# EAGLE board Tested USB TTL Dongle + Arduino2 (EAGLE 6.1)
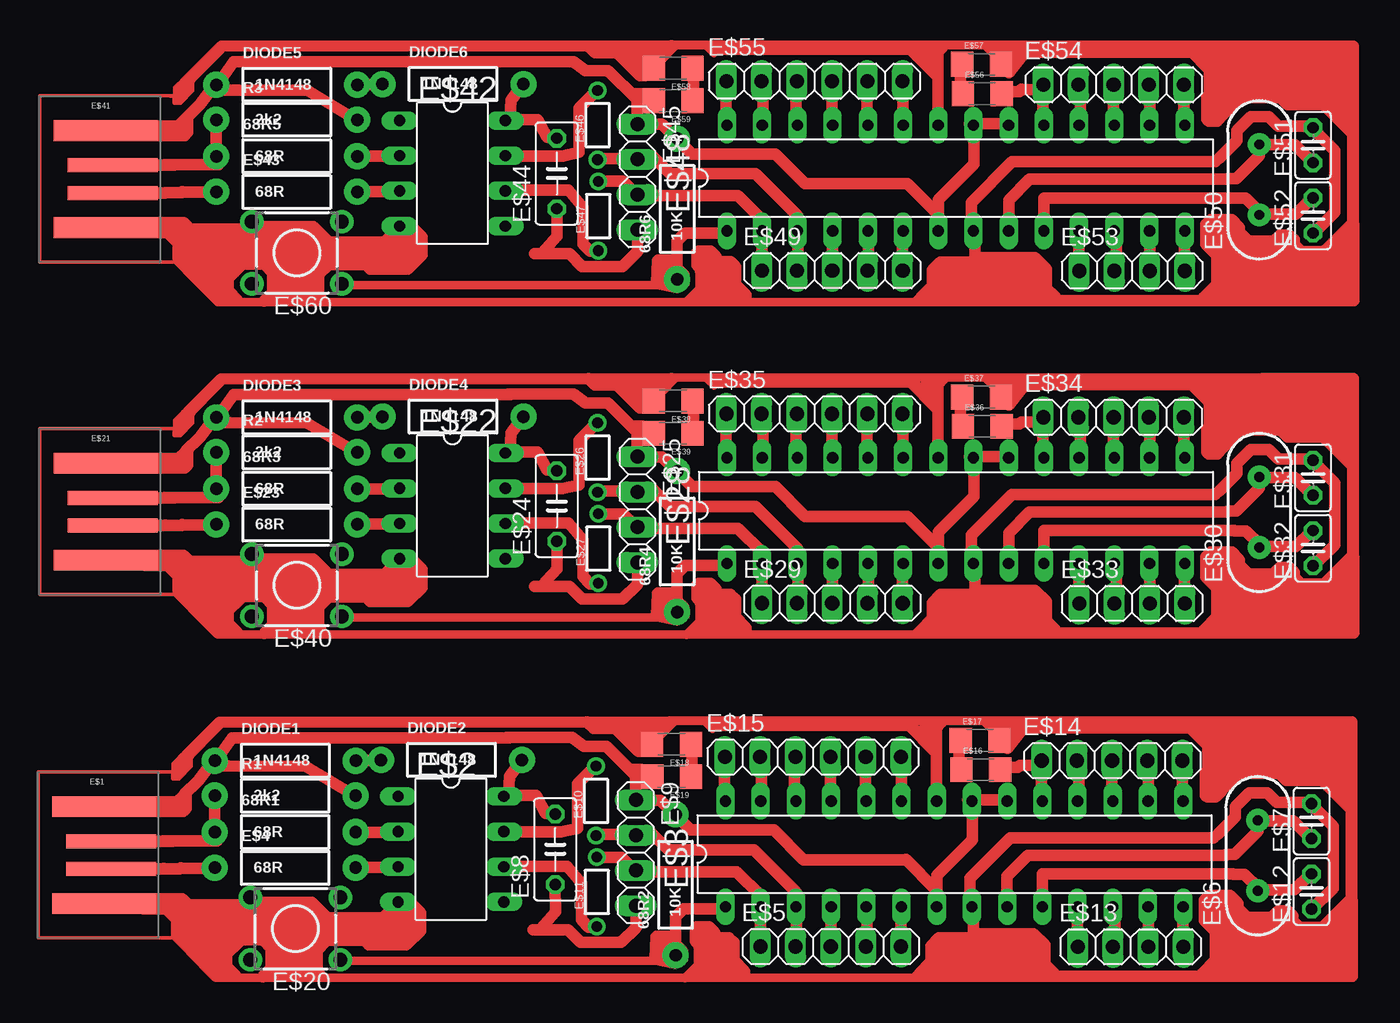
[diagram p0: board, top side]

No outline drawn. Coordinates in mm, seen from the top.
Copper layers (1*16): Top 0.035mm / dielectric 1.5mm / Bottom 0.035mm
Design rules: minimum track width 10mil, minimum drill 24mil, track to track 8mil, track to pad 8mil, pad to pad 8mil, via to via 8mil, smd to smd 8mil, copper to edge 40mil, drill to drill 8mil, minimum pad ring 10mil, minimum via ring 8mil, stop-mask expansion 4mil, vias tented up to drill 0mil, thermal gap 10mil

## Footprints (pad centres in the part's own frame; a part is rotated, then mirrored left to right if it is on the bottom)
AXIAL-0.4 = drill 0.9 pad 1.88: P$1 -5.08,0; P$2 5.08,0
USB-A-PCB = smd 7.5 x 1.5: 5V -0.2,-3.5; GND -0.2,3.5 | smd 6.5 x 1: USB_M 0.3,-1; USB_P 0.3,1
DIL8 = drill 0.813 long: 1 -3.81,-3.81; 2 -1.27,-3.81; 3 1.27,-3.81; 4 3.81,-3.81; 5 3.81,3.81; 6 1.27,3.81; 7 -1.27,3.81; 8 -3.81,3.81
DIL28-3 = drill 0.813 long: 1 -16.51,-3.81; 2 -13.97,-3.81; 3 -11.43,-3.81; 4 -8.89,-3.81; 5 -6.35,-3.81; 6 -3.81,-3.81; 7 -1.27,-3.81; 8 1.27,-3.81; 9 3.81,-3.81; 10 6.35,-3.81; 11 8.89,-3.81; 12 11.43,-3.81; 13 13.97,-3.81; 14 16.51,-3.81; 15 16.51,3.81; 16 13.97,3.81; 17 11.43,3.81; 18 8.89,3.81; 19 6.35,3.81; 20 3.81,3.81; 21 1.27,3.81; 22 -1.27,3.81; 23 -3.81,3.81; 24 -6.35,3.81; 25 -8.89,3.81; 26 -11.43,3.81; 27 -13.97,3.81; 28 -16.51,3.81
1X05 = drill 1.016 long: 1 -5.08,0; 2 -2.54,0; 3 0,0; 4 2.54,0; 5 5.08,0
HC49US = drill 0.7 pad 1.651: 1 -2.54,0; 2 2.54,0
C025-025X050 = drill 0.813 octagon: 1 -1.27,0; 2 1.27,0
C050-030X075 = drill 0.813 octagon: 1 -2.54,0; 2 2.54,0
1X04 = drill 1.016 long: 1 -3.81,0; 2 -1.27,0; 3 1.27,0; 4 3.81,0
1/6W-RES = drill 0.762: 1 -2.5,0; 2 2.5,0
1X06 = drill 1.016 long: 1 -6.35,0; 2 -3.81,0; 3 -1.27,0; 4 1.27,0; 5 3.81,0; 6 6.35,0
1206 = smd 1.6 x 1.8: 1 -1.4,0; 2 1.4,0
TL1105 = drill 1 pad 1.676: 1 -2.25,3.25; 2 2.25,3.25; 3 -2.25,-3.25; 4 2.25,-3.25

## Placement (x,y rotation side)
68R1  68R  [AXIAL-0.4]  13.06,10.56 0 top
68R2  10K  [AXIAL-0.4]  41.22,6.75 90 top
68R3  68R  [AXIAL-0.4]  13.17,35.33 0 top
68R4  10K  [AXIAL-0.4]  41.34,31.52 90 top
68R5  68R  [AXIAL-0.4]  13.17,59.33 0 top
68R6  10K  [AXIAL-0.4]  41.34,55.52 90 top
DIODE1  1N4148  [AXIAL-0.4]  13.06,15.71 0 top
DIODE2  1N4148  [AXIAL-0.4]  25.06,15.77 0 top
DIODE3  1N4148  [AXIAL-0.4]  13.17,40.48 0 top
DIODE4  1N4148  [AXIAL-0.4]  25.17,40.54 0 top
DIODE5  1N4148  [AXIAL-0.4]  13.17,64.48 0 top
DIODE6  1N4148  [AXIAL-0.4]  25.17,64.54 0 top
E$1  [USB-A-PCB]  0.22,8.9 0 top
E$2  [DIL8]  25.02,9.33 270 top
E$3  [DIL28-3]  61.33,8.98 0 top
E$4  68R  [AXIAL-0.4]  13.06,7.99 0 top
E$5  [1X05]  52.42,2.3 0 top
E$6  [HC49US]  83.22,8.87 90 top
E$7  [C025-025X050]  87.1,11.36 90 top
E$8  [C050-030X075]  32.55,9.31 90 top
E$9  [1X04]  38.36,9.06 270 top
E$10  [1/6W-RES]  35.49,12.81 90 top
E$11  [1/6W-RES]  35.54,6.25 90 top
E$12  [C025-025X050]  87.1,6.27 90 top
E$13  [1X04]  74.05,2.29 0 top
E$14  [1X05]  72.71,15.72 0 top
E$15  [1X06]  51.13,15.97 0 top
E$16  [1206]  63.23,15.07 0 top
E$17  [1206]  63.19,17.18 0 top
E$18  [1206]  40.94,16.9 180 top
E$19  [1206]  40.94,14.56 180 top
E$20  [TL1105]  13.8,3.6 90 top
E$21  [USB-A-PCB]  0.33,33.67 0 top
E$22  [DIL8]  25.13,34.1 270 top
E$23  68R  [AXIAL-0.4]  13.17,32.76 0 top
E$24  [C050-030X075]  32.66,34.08 90 top
E$25  [1X04]  38.47,33.83 270 top
E$26  [1/6W-RES]  35.6,37.58 90 top
E$27  [1/6W-RES]  35.65,31.02 90 top
E$28  [DIL28-3]  61.44,33.75 0 top
E$29  [1X05]  52.53,27.07 0 top
E$30  [HC49US]  83.33,33.64 90 top
E$31  [C025-025X050]  87.21,36.13 90 top
E$32  [C025-025X050]  87.21,31.04 90 top
E$33  [1X04]  74.16,27.06 0 top
E$34  [1X05]  72.82,40.49 0 top
E$35  [1X06]  51.24,40.74 0 top
E$36  [1206]  63.34,39.84 0 top
E$37  [1206]  63.3,41.95 0 top
E$38  [1206]  41.05,41.67 180 top
E$39  [1206]  41.05,39.33 180 top
E$40  [TL1105]  13.91,28.37 90 top
E$41  [USB-A-PCB]  0.33,57.67 0 top
E$42  [DIL8]  25.13,58.09 270 top
E$43  68R  [AXIAL-0.4]  13.17,56.76 0 top
E$44  [C050-030X075]  32.66,58.08 90 top
E$45  [1X04]  38.47,57.83 270 top
E$46  [1/6W-RES]  35.6,61.57 90 top
E$47  [1/6W-RES]  35.65,55.01 90 top
E$48  [DIL28-3]  61.44,57.75 0 top
E$49  [1X05]  52.53,51.07 0 top
E$50  [HC49US]  83.33,57.63 90 top
E$51  [C025-025X050]  87.21,60.12 90 top
E$52  [C025-025X050]  87.21,55.04 90 top
E$53  [1X04]  74.16,51.05 0 top
E$54  [1X05]  72.82,64.49 0 top
E$55  [1X06]  51.24,64.74 0 top
E$56  [1206]  63.34,63.84 0 top
E$57  [1206]  63.3,65.95 0 top
E$58  [1206]  41.05,65.67 180 top
E$59  [1206]  41.05,63.33 180 top
E$60  [TL1105]  13.91,52.36 90 top
R1  2k2  [AXIAL-0.4]  13.06,13.19 0 top
R2  2k2  [AXIAL-0.4]  13.17,37.96 0 top
R3  2k2  [AXIAL-0.4]  13.17,61.96 0 top

## Library data of the parts
68R1-68R6 DIODE1-DIODE6 E$4 E$10 E$11 E$16-E$19 E$23 E$26 E$27 E$36-E$39 E$43 E$46 E$47 E$56-E$59 R1-R3 = SparkFun-Passives
E$1 E$21 E$41 = SparkFun-Connectors
E$2 E$22 E$42 = microchip
E$3 E$28 E$48 = atmel
E$5 E$9 E$13-E$15 E$25 E$29 E$33-E$35 E$45 E$49 E$53-E$55 = pinhead
E$6 E$30 E$50 = SparkFun-FreqCtrl
E$7 E$8 E$12 E$24 E$31 E$32 E$44 E$51 E$52 = rcl
E$20 E$40 E$60 = switch

## Tracks (layer width: path | path; a pad name or v marks a point on that pad's centre or on a via)
S$1
  Top 0.813: 5.53,9.93 8.15,9.93 7.91,10.29
S$2
  Top 0.813: 5.53,7.96 7.6,7.96 8.03,8.04
S$3
  Top 0.813: 7.7,12.77 7.97,13.2 7.97,10.44
S$4
  Top 0.813: 17.67,10.56 21.4,10.56 21.49,10.65
S$5
  Top 0.813: 17.77,8.01 21.56,8.01 21.74,8.16
S$6
  Top 0.254: 5.49,3.74 5.37,3.63 5.37,3.91 5.41,3.95
S$7
  Top 0.813: 4.42,12.52 5.79,12.52
S$8
  Top 0.813: 17.85,15.72 20.24,15.72 19.94,15.79
S$9
  Top 0.813: 30.48,15.38 30.16,15.79 29.24,14.59 29.16,13.36 28.83,13.08
S$10
  Top 0.813: 18.11,13.17 14.53,15.32 8.94,15.32 7.93,15.32 7.89,15.28
S$11
  Top 0.813: 28.91,8.1 33.4,8.1 34.42,6.86 34.42,4.23 34.95,3.7 35.46,3.7 35.54,3.78
S$12
  Top 0.813: 28.64,10.58 32.97,10.58 34.16,10.84 34.16,14.03 35.46,15.33
S$13
  Top 0.813: 32.53,11.91 31.85,11.91 31.15,13.2 28.98,13.2
S$14
  Top 0.813: 31.48,3.57 32.58,4.79 32.55,6.73 32.44,6.8
S$15
  Top 0.813: 7.79,15.32 9.22,17.36 16.71,17.36 29.2,17.36
S$16
  Top 0.813: 35.49,10.39 38.22,10.39 38.3,10.47
S$17
  Top 0.813: 35.49,8.74 37.32,8.74 38.25,7.82
S$18
  Top 0.813: 29.02,17.39 33.77,17.39 34.6,16.74 36.26,16.74 38.33,14.67 38.33,12.99 38.27,12.94
S$19
  Top 0.813: 30.95,3.51 33.47,3.51 34.37,2.61 37.29,2.61 38.35,3.67 38.35,5.19 38.25,5.29
S$20
  Top 0.813: 6.45,16.59 8.32,18.46
S$21
  Top 0.813: 8.36,18.48 40.82,18.52
S$22
  Top 0.813: 4.25,9.93 5.5,9.93
S$23
  Top 0.813: 5.79,12.9 5.79,13.28 6.77,14.27 7.91,15.75 7.97,15.81 7.63,15.26 7.57,15.32
S$24
  Top 0.813: 4.35,7.93 5.47,7.93 5.53,7.99
S$25
  Top 0.813: 6.49,16.59 6.45,16.59 5.91,16.05 5.91,15.42
S$26
  Top 0.61: 39.98,1.26 17.01,1.26
S$27
  Top 0.254: 4.86,14.91 -4.76,14.91 -4.76,2.93 6,2.93 6,2.6
S$28
  Top 0.254: 2.28,14.92 5.5,14.92 5.5,15.18
S$29
  Top 0.254: 6.59,16.87 6.33,16.87 5.53,16.08 5.52,14.99 5.47,14.94 5.47,16.02 5.57,16.12
S$30
  Top 0.254: 4.67,14.91 5.83,14.91 6.23,15.31 6.23,15.85 6.87,16.8 7.03,16.8 7.04,16.82
S$31
  Top 0.254: 5.77,15.3 5.77,15.15 5.68,15.06
S$32
  Top 0.813: 6.23,2.87 6.23,2.04 8.1,0.17
S$33
  Top 0.254: 6.44,3.19 6.44,3.21
S$34
  Top 0.254: 5.37,3.14 5.43,3.14 5.5,3.21
S$35
  Top 0.813: 5.74,3.79 4.53,5 5.23,5
S$36
  Top 0.254: 4.96,14.4 5.4,14.4 6.29,15.29 6.29,15.96
S$37
  Top 0.254: 4.93,14.43 4.93,14.77 4.98,14.81
S$38
  Top 0.254: 5.04,14.63 5.21,14.63 5.38,14.8 5.57,14.8 5.57,14.72 5.38,14.54 5.3,14.54 5.04,14.8
S$39
  Top 0.254: 5.69,3.71 5.69,3.52
S$40
  Top 0.61: 9.98,5.3 10.47,5.78
  Top 0.813: 3.96,5.3 9.98,5.3
S$41
  Top 0.813: 10.36,5.49 14.98,5.49 16.09,4.37 20.12,4.37 21.23,5.49
S$42
  Top 0.813: 38.64,7.7 45.62,7.7 47.37,5.95 47.37,5.16
S$43
  Top 0.254: 5.03,3.06 5.03,4.12
S$44
  Top 0.254: 6.37,3.6 5.58,3.6 5.25,3.27 | 5.25,2.92 5.25,3.27 | 5.25,3.27 5.25,3.98 5.17,4.06 5.17,4.08 5.21,4.11
S$45
  Top 0.254: 4.95,4.15 4.95,3.03 4.91,2.99
S$46
  Top 0.254: 6.51,1.6 6.28,1.6 5,2.88 5.27,2.88 5.83,2.32 5.83,2.82 5.72,2.93 5.59,2.93 5.51,2.85 5.51,2.8 5.67,2.64 5.77,2.64
S$47
  Top 0.254: 4.97,14.99 4.97,15.52 5.61,16.16 5.61,15.94 5.16,15.49 5.16,15.01 5.13,14.99 5.13,15.28 5.21,15.36 5.21,15.22 5.19,15.2 | 5.19,15.2 | 5.19,15.2 5.29,15.09
S$48
  Top 0.254: 5.28,15.51 5.28,15.42 5.36,15.35
S$49
  Top 0.254: 8.45,18.17 8.45,18.11 5.99,15.64
S$50
  Top 0.254: 5.47,12.43 5.65,12.24 6.06,12.24 6.21,12.39 6.21,13.32 6.59,13.7
S$51
  Top 0.813: 38.4,10.55 39.43,10.55 40.7,9.29 46.89,9.29 49.91,6.27 49.91,5.48 49.99,5.4
S$52
  Top 0.254: 6.63,1.83 6.78,1.68
S$53
  Top 0.813: 8.65,5.23 8.65,0.41 8.69,0.37 8.66,0.37 5.73,3.3 5.73,4.56 5.7,4.6 8.06,4.6 8.1,4.56 8.1,1.56 8.14,1.52 8.14,1.82 6.29,3.67 6.29,4 6.25,4.04 7.4,4.04 7.51,3.93 7.51,3.19 7.62,3.08 7.62,3.34 7.29,3.67 7.17,3.67
S$54
  Top 0.813: 8.63,2.21 9.3,2.21 9.64,2.79 11.47,2.79 12.03,2.17 12.03,0.79 12.44,0.38 15.4,0.38 15.57,0.26 15.53,0.33 15.37,0.77 15.37,2.04 16.07,2.74 18.78,2.74 19.09,2.43 21.79,2.43 22.81,3.46 22.81,4.74 22.06,5.49 21.17,5.49 21.04,5.61
S$55
  Top 0.813: 21.86,5.03 21.63,5.03 21.22,4.62 22.05,4.62 22.16,4.73 22.16,3.74 21.49,3.07 15.41,3.07 14.87,2.53 14.87,3.29 15.44,3.85 20.44,3.85 20.86,4.28 21.53,4.28 21.54,4.26 21.54,4.21 21.14,3.82 20.97,3.82 20.78,3.63 9.35,3.63 9.23,3.74 9.23,4.5 9.38,4.65 15.11,4.65 15.19,4.57 15.19,4.51 15.28,4.42 9.56,4.42 9.05,3.92 9.05,4.57 9.3,4.82 14.48,4.82 14.61,4.7
S$56
  Top 0.813: 14.95,4.87 14.95,1.24 14.59,0.88 12.46,0.88 12.23,1.11 12.23,2.78 12.48,3.02 9.05,3.02 8.97,3.1 8.97,2.8 9,2.78 14.21,2.78 14.56,3.12 13.46,3.12 13.44,3.11 13.12,3.11 12.69,3.54 12.69,1.54 12.74,1.49 14.17,1.49 14.4,1.71 14.4,2.01 14.33,2.07 13.51,2.07 13.36,1.92 12.97,1.92 12.94,1.96 13.15,1.96 13.26,2.07
S$57
  Top 0.813: 12.81,1.56 12.81,1.47 11.45,0.11
S$58
  Top 0.813: 8.84,2.53 8.84,0.37 8.76,0.3
S$59
  Top 0.813: 10.09,3.14 10.09,3.02 8.51,1.44
S$60
  Top 0.813: 8.6,0.82 8.87,0.82 9.54,0.15
S$61
  Top 0.813: 3.14,7.9 4.25,7.9 4.28,7.93
S$62
  Top 0.813: 4.93,9.91 2.83,9.91 2.8,9.94
S$63
  Top 0.254: 6.46,1.55 6.46,3.5
S$64
  Top 0.813: 4.71,12.5 0.8,12.5
S$65
  Top 0.813: 4.93,5.12 0.49,5.12
S$66
  Top 0.813: 2.83,5.03 4.92,5.03 4.99,5.11
S$67
  Top 0.813: 2.55,5.21 2.65,5.21 3.21,5.76 5.61,5.76 6.22,5.16
S$68
  Top 0.813: 2.42,12.44 3.12,12.44 3.51,12.05 5.69,12.05 5.92,12.28
S$69
  Top 0.813: 3.07,12.73 5.24,12.73 5.74,13.22
S$70
  Top 0.813: 82.89,16.85 83.47,16.85 83.45,18.5 90,18.5 90.02,5.33
S$71
  Top 0.813: 82.62,1.52 83.99,1.52 83.99,0.15 90.02,0.15 90.02,5.61
S$72
  Top 0.813: 38.4,12.86 40.15,12.86 42.29,10.71 48.32,10.71 50.46,8.57 57.84,8.57
S$73
  Top 0.813: 60.01,5.26 60.01,6.4 57.83,8.58
S$74
  Top 0.813: 60.09,6.16 60.09,7.44 62.64,9.99 62.64,12.77 62.58,12.83
S$75
  Top 0.813: 41.22,1.65 41.22,4.44 41.79,5.01 44.66,5.01 44.85,5.2
S$76
  Top 0.813: 39.34,14.8 39.02,14.8 38.75,15.07 37.98,15.07 37.96,15.09
S$77
  Top 0.813: 83.96,18.2 89.18,18.2 89.7,17.69 89.7,13.72 89.35,13.38 89.32,13.38 85.08,17.62 88.88,17.62 89.14,17.37 89.14,14.28 89.16,14.26 89.16,14.46 86.51,17.11 88.43,17.11 88.5,17.17 88.5,16.51 88.43,16.45 88.43,16.17 88.39,16.12 88.39,15.89 88.52,15.76 87.81,15.76 86.94,16.64 86.94,16.79 87.17,17.02 87.17,17 87.47,16.7 87.77,16.7 87.94,16.53 87.94,16.32 87.88,16.25 86.66,16.25 85.87,17.05 85.93,17.05 85.95,17.07 85.95,16.53 86.38,16.1 86.66,16.1 87.26,15.5 87.26,15.46 87.15,15.35 87.15,15.27 87.11,15.22
S$78
  Top 0.305: 39.13,0.16 62.14,0.16
  Top 0.813: 62.14,0.16 62.71,0.73 62.71,5.07 62.58,5.2
S$79
  Top 0.813: 67.68,5.16 67.68,7.54 81.41,7.54
S$80
  Top 0.813: 65.14,5.32 65.14,7.38 66.65,8.89 80.93,8.89
S$81
  Top 0.813: 62.45,5.4 62.45,7.23 65.38,10.16 80.06,10.16
S$82
  Top 0.813: 80.96,8.95 81.56,8.95 83.21,10.61 83.21,11.34 83.12,11.43
S$83
  Top 0.813: 81.46,7.53 82.24,7.53 83.21,6.57 83.21,6.34 83.25,6.29
S$84
  Top 0.813: 83.53,6.38 85.87,6.38 87.02,7.53
S$85
  Top 0.813: 83.3,11.39 85.78,11.39 87.16,10.01
S$86
  Top 0.813: 87.06,12.72 84.58,12.72 83.9,13.41 82.61,13.41 81.6,12.4 81.6,11.66 80.32,10.38
S$87
  Top 0.813: 87.2,12.67 87.2,12.44 88.67,10.97 88.67,6.52 87.06,4.91
S$88
  Top 0.813: 47.34,5.32 47.34,2.41 47.41,2.33
S$89
  Top 0.813: 49.94,5.32 49.94,2.41 49.9,2.37
S$90
  Top 0.813: 52.42,5.36 52.42,2.41 52.38,2.37
S$91
  Top 0.813: 55.02,5.32 55.02,2.6 54.95,2.52
S$92
  Top 0.813: 57.47,5.24 57.47,2.41 57.55,2.33
S$93
  Top 0.813: 70.2,5.32 70.2,2.64 70.39,2.45
S$94
  Top 0.813: 72.92,5.32 72.92,2.71 72.73,2.52
S$95
  Top 0.813: 75.33,5.43 75.33,2.45 75.29,2.41
S$96
  Top 0.813: 77.81,5.32 77.81,2.45 77.77,2.41
S$97
  Top 0.813: 77.77,15.49 77.77,12.81 77.89,12.7
S$98
  Top 0.813: 75.33,15.41 75.33,12.97 75.36,12.93
S$99
  Top 0.813: 72.69,15.49 72.69,12.93 72.73,12.89
S$100
  Top 0.813: 70.32,15.49 70.32,13 70.2,12.89
S$101
  Top 0.813: 67.6,15.68 67.6,12.93 67.68,12.85
S$102
  Top 0.813: 44.74,15.49 44.74,12.74 44.81,12.66
S$103
  Top 0.813: 47.41,15.57 47.41,12.85 47.38,12.81
S$104
  Top 0.813: 49.78,15.68 49.78,12.81
S$105
  Top 0.813: 52.38,15.61 52.38,12.81
S$106
  Top 0.813: 54.91,15.64 54.91,12.89 54.98,12.81
S$107
  Top 0.813: 57.51,15.61 57.51,12.89 57.47,12.85
S$108
  Top 0.813: 61.6,0.15 84.39,0.15 89.97,5.74 89.97,12.2 84.77,17.4
S$109
  Top 0.406: 39.58,18.47 60.41,18.47 83.7,18.47
  Top 0.813: 83.7,18.47 85.31,16.87 | 60.03,12.85 60.03,18.09 60.41,18.47
S$110
  Top 0.813: 62.33,12.89 65.12,12.89 65.19,12.81
S$111
  Top 0.813: 66.06,15.36 67.46,15.36 67.58,15.49
S$112
  Top 0.813: 42.4,15.04 42.4,16.39 42.34,16.45
S$113
  Top 0.813: 39.47,17.18 39.47,18.19 39.53,18.25
S$114
  Top 0.813: 61.65,15.75 61.65,16.39 61.74,16.48
S$115
  Top 0.813: 64.5,17.45 64.5,18.11 64.57,18.18
S$116
  Top 0.813: 64.89,15.22 65.91,15.22 66.06,15.38
S$117
  Top 0.813: 62.8,3.24 67.05,3.24 67.87,2.42 67.87,0.9 67.31,0.34 63.67,0.34 63.33,0.69 63.33,2.71 66.65,2.71 67.18,2.18 67.18,1.22 66.97,1.01 63.97,1.01 63.91,1.06 63.91,2.04 63.94,2.07 66.62,2.07 66.73,1.97 66.73,1.83 66.49,1.59 64.52,1.59 64.39,1.73
S$118
  Top 0.813: 67.74,1.33 67.74,1.17 68.56,0.34
S$119
  Top 0.813: 63.22,2.92 60.22,2.92 59.64,2.34 59.64,1.2 58.76,0.32
S$120
  Top 0.813: 59.88,0.51 59.88,1.75 60.51,2.39 61.95,2.39 62.16,2.18 62.16,1.11 61.63,0.58 60.38,0.58 60.27,0.69 60.27,1.3 60.59,1.62 61.55,1.62 61.6,1.67 61.6,1.33 61.36,1.09 61.02,1.09 60.91,1.2
S$121
  Top 0.813: 79.18,0.35 79.22,0.35 80.17,1.31 80.17,3.41 79.38,4.21 79.38,5.64 79.73,5.99 81.22,5.99 81.8,5.42 81.8,5.07 82.43,4.43 84.25,4.43 84.7,4.88 85.4,4.88 85.75,4.53 85.75,4.17 86.64,3.28 87.37,3.28 87.56,3.47
S$122
  Top 0.813: 86.51,3.69 87.83,3.69 87.84,3.7
S$123
  Top 0.813: 86.61,3.04 86.41,3.04 84.16,0.79 80.16,0.79 80.12,0.76 80.12,0.89 80.73,1.49 84.09,1.49 85.84,3.25 85.84,3.45 85.01,4.28 84.66,4.28 84.29,3.91 84.6,3.91 85.08,3.43 85.08,3.41 83.74,2.06 80.71,2.06 80.67,2.1 80.67,3.76 80.51,3.93 80.4,3.93 79.77,4.55 79.77,5.13 79.94,5.29 81.12,5.29 81.39,5.01 80.47,5.01 80.23,4.78 81.28,4.78 81.84,4.22 80.9,4.22 80.86,4.19 83.51,4.19 84.25,3.45 84.25,3.37 83.55,2.67 81.27,2.67 81.16,2.78 81.16,3.39 81.21,3.45 83.44,3.45 83.53,3.54 83.53,3.43 83.4,3.3 83.31,3.3 83.05,3.04
S$124
  Top 0.813: 46.2,0.26 46.2,0.54 45.43,1.31 45.43,2.6 45.08,2.95 44.21,2.95 43.47,3.69 42.75,3.69 42.92,3.25 43.21,2.81 42.81,2.67 42.81,2.65 42.99,2.47 42.99,0.96 42.37,0.33
S$125
  Top 0.813: 43.25,0.79 45.31,0.79 45.37,0.74
S$126
  Top 0.813: 42.96,3.17 43.12,3.17 43.82,2.47 44.5,2.47 44.84,2.14 44.84,1.46 44.82,1.44 43.45,1.44 43.44,1.46 43.44,2.42 43.31,2.54 43.4,2.54 43.97,1.97 44.12,1.97 44.14,1.95
S$127
  Top 0.813: 87.66,14.28 85.27,14.28 84.77,14.78 81.83,14.78 80.64,13.59 80.64,13.54 80.18,13.09 79.58,13.09 79.44,13.22 79.44,14.83 79.63,15.01 79.63,16.8 78.21,18.23 79.03,18.23 80.27,16.99 80.27,14.05 80.04,13.82 80.04,13.91 81,14.88 86.7,14.88 86.74,14.83 81.19,14.83 80.64,15.38 85.87,15.38 85.92,15.34 85.92,15.47 83.53,17.86 80.04,17.86 80,17.82 80,16.67 80.73,15.93 84.81,15.93 84.86,15.98 84.49,15.98 83.21,17.26 80.32,17.26 80.27,17.31 80.27,17.08 80.73,16.62 83.44,16.62
S$128
  Top 0.813: 78.87,18.07 66.3,18.07 65.15,16.59 65.15,17.35 65.71,17.9 65.26,17.9 65.25,17.89 64.97,17.89
S$129
  Top 0.813: 64.27,17.76 64.27,17.92 64.01,18.18
S$130
  Top 0.813: 59.77,16.7 59.71,16.7 58.37,18.05
S$131
  Top 0.813: 59.07,17.94 59.2,17.94 59.55,17.59
S$132
  Top 0.813: 60.02,15.98 60.02,16.28 57.94,18.4
S$133
  Top 0.813: 58.35,18.27 44.1,18.27 43.8,18.38
S$134
  Top 0.813: 34.84,18.51 34.82,18.51 35.29,18.04 36.9,18.04 38.56,16.38 38.91,16.38
S$135
  Top 0.813: 38.78,17.37 38.21,17.37 37.6,17.97
S$136
  Top 0.813: 37.98,17.94 38.65,17.94 39,17.59 39,17.37 38.68,17.05
S$137
  Top 0.813: 87.34,14.58 88.88,14.58 88.9,14.56
S$138
  Top 0.813: 89.74,4.89 89.74,4.82 85.61,0.69 89.25,0.69 89.42,0.86 89.42,3.67 89.53,3.77 89.42,3.77 86.72,1.07 87.34,1.07 88.9,2.64 88.9,1.39 88.84,1.33 88.2,1.33 88.09,1.22 87.69,1.22 87.66,1.24 87.66,1.27 87.94,1.54
S$139
  Top 0.813: 43.98,1.54 43.83,1.54 42.67,2.7 42.67,3.65 42.75,3.73 43.62,3.73 44.03,3.32
S$140
  Top 0.406: 38.8,18.48 40.62,18.48 40.85,18.71 86.22,18.71 86.45,18.48
S$141
  Top 0.406: 65.49,18.22 82.86,18.22
S$142
  Top 0.406: 59.75,18.4 59.75,18.33 59.53,18.11
S$143
  Top 0.61: 7.74,0.61 7.74,0.39 8.09,0.04 63.49,0.04 63.57,0.11
S$144
  Top 0.61: 59.86,0.54 59.44,0.54 59.25,0.35
S$145
  Top 0.61: 59.44,0.66 58.98,0.66 58.44,0.13
S$146
  Top 0.61: 45.94,0.41 43.09,0.41 43.01,0.48
S$147
  Top 0.61: 40.06,1.68 41.06,1.68
S$148
  Top 0.406: 41.09,18.38 41.03,18.38 40.21,17.56
S$149
  Top 0.406: 39.81,17.71 39.9,17.71 40.41,18.21
S$150
  Top 0.61: 39.8,3.16 40.73,3.16 40.8,3.1 40.8,2.08 40.84,2.04 40.73,2.04 40.62,2.15 40.62,2.65 40.51,2.77 40.51,2.7 40.29,2.48 40.29,1.97 40.31,1.95 40.31,2.57 40,2.88 39.89,2.88 39.71,3.05 39.62,1.45 39.64,1.31 41.2,0.97 41.81,1.37 41.81,2.01 41.39,2.43 41.39,1.64 41.13,1.37 40.27,1.37 40.18,1.28 40.18,2.57 40.2,2.59
S$151
  Top 0.61: 42.9,1.31 43.05,1.18 41.9,0.03
S$152
  Top 0.61: 42.85,2.88 42.85,0.77 42.68,0.73
S$153
  Top 0.61: 42.81,2.23 42.77,2.54 42.89,2.71 43.11,2.94 42.77,3.27 43.34,3.37 44.12,3.25
S$154
  Top 0.406: 40.17,18.07 40.02,18.07 39.99,18.04
S$155
  Top 0.406: 37.87,16.83 37.87,17.18 38.11,17.41
S$156
  Top 0.406: 45.26,18.35 44.45,18.35 44.35,18.37 43.87,17.89 43.34,18.42
S$157
  Top 0.406: 41.43,18.46 41.18,18.46 40.12,17.39
S$158
  Top 0.406: 64.14,17.56 64.14,17.74 63.34,18.55
S$159
  Top 0.813: 5.64,34.7 8.27,34.7 8.02,35.06
S$160
  Top 0.813: 5.64,32.73 7.71,32.73 8.14,32.81
S$161
  Top 0.813: 7.81,37.54 8.08,37.97 8.08,35.21
S$162
  Top 0.813: 17.78,35.33 21.51,35.33 21.61,35.42
S$163
  Top 0.813: 17.88,32.78 21.67,32.78 21.85,32.93
S$164
  Top 0.813: 4.53,37.29 5.89,37.29
S$165
  Top 0.813: 17.96,40.49 20.35,40.49 20.05,40.56
S$166
  Top 0.813: 30.59,40.15 30.27,40.56 29.35,39.36 29.27,38.13 28.94,37.85
S$167
  Top 0.813: 18.22,37.94 14.64,40.09 9.05,40.09 8.04,40.09 8,40.05
S$168
  Top 0.813: 32.64,36.69 31.96,36.69 31.26,37.97 29.09,37.97
S$169
  Top 0.813: 31.59,28.34 32.69,29.56 32.66,31.5 32.55,31.57
S$170
  Top 0.813: 7.9,40.09 9.33,42.13 16.82,42.13 29.31,42.13
S$171
  Top 0.813: 29.02,32.87 33.51,32.87 34.53,31.63 34.53,29 35.06,28.47 35.57,28.47 35.65,28.55
S$172
  Top 0.813: 28.75,35.35 33.08,35.35 34.27,35.61 34.27,38.8 35.57,40.1
S$173
  Top 0.813: 35.6,35.16 38.33,35.16 38.41,35.24
S$174
  Top 0.813: 35.6,33.52 37.43,33.52 38.36,32.59
S$175
  Top 0.813: 29.13,42.16 33.88,42.16 34.71,41.51 36.37,41.51 38.44,39.44 38.44,37.76 38.38,37.71
S$176
  Top 0.813: 31.06,28.28 33.58,28.28 34.48,27.38 37.4,27.38 38.46,28.44 38.46,29.96 38.36,30.06
S$177
  Top 0.813: 6.34,27.64 6.34,26.81 8.21,24.94
S$178
  Top 0.813: 6.56,41.36 8.43,43.23
S$179
  Top 0.813: 8.47,43.26 40.93,43.29
S$180
  Top 0.813: 5.89,37.67 5.89,38.05 6.88,39.04 8.02,40.52 8.08,40.59 7.74,40.03 7.68,40.09
S$181
  Top 0.813: 4.37,34.7 5.61,34.7
S$182
  Top 0.813: 4.46,32.7 5.58,32.7 5.64,32.76
S$183
  Top 0.813: 6.6,41.37 6.56,41.37 6.02,40.82 6.02,40.19
S$184
  Top 0.254: 4.97,39.68 -4.65,39.68 -4.65,27.7 6.12,27.7 6.12,27.38
S$185
  Top 0.254: 2.39,39.69 5.61,39.69 5.61,39.95
S$186
  Top 0.254: 6.7,41.64 6.44,41.64 5.64,40.85 5.63,39.76 5.58,39.71 5.58,40.79 5.68,40.89
S$187
  Top 0.254: 4.78,39.68 5.94,39.68 6.34,40.08 6.34,40.62 6.97,41.57 7.14,41.57 7.15,41.59
S$188
  Top 0.254: 5.88,40.07 5.88,39.92 5.79,39.83
S$189
  Top 0.254: 5.6,28.52 5.49,28.4 5.49,28.68 5.52,28.72
S$190
  Top 0.254: 6.74,26.6 6.89,26.45
S$191
  Top 0.254: 6.48,28.37 5.69,28.37 5.36,28.04 | 5.36,27.68 5.36,28.04 | 5.36,28.04 5.36,28.75 5.28,28.83 5.28,28.85 5.32,28.88
S$192
  Top 0.254: 6.55,27.96 6.55,27.98
S$193
  Top 0.254: 5.49,27.91 5.54,27.91 5.61,27.98
S$194
  Top 0.254: 5.14,27.83 5.14,28.89
S$195
  Top 0.254: 5.07,39.17 5.51,39.17 6.41,40.06 6.41,40.73
S$196
  Top 0.254: 5.04,39.2 5.04,39.53 5.09,39.58
S$197
  Top 0.254: 5.15,39.4 5.32,39.4 5.49,39.57 5.67,39.57 5.67,39.49 5.49,39.3 5.41,39.3 5.15,39.57
S$198
  Top 0.254: 5.06,28.92 5.06,27.8 5.02,27.76
S$199
  Top 0.254: 6.63,26.37 6.39,26.37 5.11,27.65 5.38,27.65 5.93,27.09 5.93,27.59 5.83,27.7 5.7,27.7 5.62,27.62 5.62,27.57 5.78,27.41 5.88,27.41
S$200
  Top 0.254: 5.09,39.76 5.09,40.29 5.72,40.93 5.72,40.71 5.27,40.26 5.27,39.78 5.25,39.76 5.25,40.05 5.33,40.13 5.33,39.99 5.3,39.97 | 5.3,39.97 | 5.3,39.97 5.41,39.86
S$201
  Top 0.254: 5.39,40.28 5.39,40.19 5.47,40.12
S$202
  Top 0.254: 5.8,28.48 5.8,28.29
S$203
  Top 0.254: 6.57,26.32 6.57,28.27
S$204
  Top 0.813: 38.75,32.47 45.73,32.47 47.48,30.72 47.48,29.93
S$205
  Top 0.813: 38.51,35.33 39.54,35.33 40.81,34.05 47,34.05 50.02,31.04 50.02,30.25 50.1,30.17
S$206
  Top 0.813: 38.51,37.63 40.26,37.63 42.4,35.48 48.43,35.48 50.57,33.34 57.95,33.34
S$207
  Top 0.813: 60.12,30.03 60.12,31.17 57.94,33.35
S$208
  Top 0.813: 60.2,30.93 60.2,32.21 62.75,34.76 62.75,37.55 62.7,37.6
S$209
  Top 0.305: 39.24,24.93 62.25,24.93
  Top 0.813: 62.25,24.93 62.82,25.5 62.82,29.84 62.69,29.96
S$210
  Top 0.813: 67.79,29.93 67.79,32.31 81.52,32.31
S$211
  Top 0.813: 65.25,30.09 65.25,32.16 66.76,33.66 81.04,33.66
S$212
  Top 0.813: 62.55,30.17 62.55,32 65.49,34.93 80.17,34.93
S$213
  Top 0.813: 81.07,33.72 81.67,33.72 83.32,35.38 83.32,36.11 83.23,36.2
S$214
  Top 0.813: 81.58,32.3 82.35,32.3 83.32,31.34 83.32,31.11 83.36,31.06
S$215
  Top 0.813: 83.64,31.15 85.98,31.15 87.13,32.3
S$216
  Top 0.813: 83.41,36.16 85.89,36.16 87.27,34.78
S$217
  Top 0.813: 87.17,37.49 84.7,37.49 84.01,38.18 82.72,38.18 81.71,37.17 81.71,36.43 80.43,35.15
S$218
  Top 0.813: 87.31,37.44 87.31,37.21 88.78,35.74 88.78,31.29 87.17,29.68
S$219
  Top 0.813: 47.45,30.09 47.45,27.18 47.52,27.1
S$220
  Top 0.813: 50.05,30.09 50.05,27.18 50.01,27.14
S$221
  Top 0.813: 52.53,30.12 52.53,27.18 52.49,27.14
S$222
  Top 0.813: 55.13,30.09 55.13,27.37 55.06,27.3
S$223
  Top 0.813: 57.58,30.01 57.58,27.18 57.66,27.1
S$224
  Top 0.813: 70.31,30.09 70.31,27.41 70.5,27.22
S$225
  Top 0.813: 73.03,30.09 73.03,27.49 72.84,27.3
S$226
  Top 0.813: 75.44,30.2 75.44,27.22 75.4,27.18
S$227
  Top 0.813: 77.92,30.09 77.92,27.22 77.88,27.18
S$228
  Top 0.813: 77.88,40.26 77.88,37.58 78,37.47
S$229
  Top 0.813: 75.44,40.18 75.44,37.74 75.47,37.7
S$230
  Top 0.813: 72.8,40.26 72.8,37.7 72.84,37.66
S$231
  Top 0.813: 70.43,40.26 70.43,37.77 70.31,37.66
S$232
  Top 0.813: 67.71,40.45 67.71,37.7 67.79,37.62
S$233
  Top 0.813: 44.85,40.26 44.85,37.51 44.92,37.43
S$234
  Top 0.813: 47.52,40.34 47.52,37.62 47.49,37.58
S$235
  Top 0.813: 49.89,40.45 49.89,37.58
S$236
  Top 0.813: 52.49,40.38 52.49,37.58
S$237
  Top 0.813: 55.02,40.41 55.02,37.66 55.09,37.58
S$238
  Top 0.813: 57.62,40.38 57.62,37.66 57.58,37.62
S$239
  Top 0.813: 61.71,24.92 84.5,24.92 90.08,30.51 90.08,36.97 84.88,42.17
S$240
  Top 0.406: 39.69,43.24 60.52,43.24 83.81,43.24
  Top 0.813: 83.81,43.24 85.42,41.64 | 60.14,37.62 60.14,42.86 60.52,43.24
S$241
  Top 0.813: 62.44,37.66 65.23,37.66 65.3,37.58
S$242
  Top 0.813: 66.17,40.13 67.57,40.13 67.7,40.26
S$243
  Top 0.813: 41.33,26.41 41.33,29.21 41.9,29.78 44.77,29.78 44.96,29.97
S$244
  Top 0.813: 39.46,39.57 39.13,39.57 38.86,39.84 38.09,39.84 38.07,39.86
S$245
  Top 0.813: 42.51,39.81 42.51,41.16 42.45,41.23
S$246
  Top 0.813: 39.58,41.95 39.58,42.96 39.64,43.02
S$247
  Top 0.813: 61.77,40.52 61.77,41.16 61.85,41.25
S$248
  Top 0.813: 64.61,42.22 64.61,42.88 64.68,42.95
S$249
  Top 0.813: 65,39.99 66.02,39.99 66.17,40.15
S$250
  Top 0.813: 62.91,28.01 67.16,28.01 67.98,27.19 67.98,25.67 67.42,25.12 63.78,25.12 63.44,25.46 63.44,27.48 66.76,27.48 67.29,26.95 67.29,25.99 67.08,25.78 64.08,25.78 64.02,25.83 64.02,26.82 64.05,26.84 66.73,26.84 66.84,26.74 66.84,26.6 66.6,26.36 64.63,26.36 64.5,26.5
S$251
  Top 0.813: 67.85,26.1 67.85,25.94 68.67,25.12
S$252
  Top 0.813: 63.33,27.69 60.33,27.69 59.75,27.11 59.75,25.96 58.87,25.09
S$253
  Top 0.813: 59.99,25.27 59.99,26.52 60.62,27.16 62.06,27.16 62.27,26.95 62.27,25.89 61.74,25.36 60.49,25.36 60.38,25.46 60.38,26.07 60.7,26.39 61.66,26.39 61.71,26.44 61.71,26.1 61.47,25.86 61.13,25.86 61.02,25.96
S$254
  Top 0.813: 79.3,25.12 79.33,25.12 80.28,26.08 80.28,28.18 79.49,28.98 79.49,30.41 79.84,30.76 81.33,30.76 81.91,30.19 81.91,29.84 82.55,29.2 84.36,29.2 84.81,29.65 85.51,29.65 85.86,29.3 85.86,28.95 86.75,28.05 87.48,28.05 87.67,28.24
S$255
  Top 0.813: 86.62,28.46 87.94,28.46 87.95,28.47
S$256
  Top 0.813: 86.72,27.81 86.52,27.81 84.27,25.56 80.27,25.56 80.23,25.53 80.23,25.66 80.84,26.26 84.2,26.26 85.95,28.02 85.95,28.22 85.12,29.05 84.77,29.05 84.4,28.68 84.71,28.68 85.19,28.2 85.19,28.18 83.85,26.84 80.82,26.84 80.79,26.87 80.79,28.53 80.62,28.7 80.51,28.7 79.88,29.32 79.88,29.9 80.05,30.06 81.23,30.06 81.5,29.79 80.58,29.79 80.34,29.55 81.39,29.55 81.95,28.99 81.01,28.99 80.97,28.96 83.62,28.96 84.36,28.22 84.36,28.14 83.66,27.44 81.38,27.44 81.27,27.55 81.27,28.16 81.32,28.22 83.55,28.22 83.64,28.31 83.64,28.2 83.51,28.07 83.42,28.07 83.16,27.81
S$257
  Top 0.813: 46.31,25.03 46.31,25.3 45.54,26.08 45.54,27.37 45.19,27.72 44.32,27.72 43.58,28.46 42.86,28.46 43.03,28.02 43.32,27.58 42.92,27.44 42.92,27.43 43.1,27.24 43.1,25.73 42.48,25.1
S$258
  Top 0.813: 43.36,25.56 45.43,25.56 45.48,25.51
S$259
  Top 0.813: 43.07,27.94 43.23,27.94 43.93,27.24 44.62,27.24 44.95,26.91 44.95,26.23 44.93,26.21 43.56,26.21 43.55,26.23 43.55,27.19 43.42,27.32 43.51,27.32 44.08,26.74 44.23,26.74 44.25,26.73
S$260
  Top 0.813: 87.77,39.05 85.38,39.05 84.88,39.55 81.94,39.55 80.75,38.36 80.75,38.31 80.29,37.86 79.69,37.86 79.56,37.99 79.56,39.6 79.74,39.78 79.74,41.58 78.32,43 79.14,43 80.38,41.76 80.38,38.82 80.15,38.59 80.15,38.68 81.12,39.65 86.81,39.65 86.85,39.6 81.3,39.6 80.75,40.15 85.98,40.15 86.03,40.11 86.03,40.24 83.64,42.63 80.15,42.63 80.11,42.59 80.11,41.44 80.84,40.7 84.92,40.7 84.97,40.75 84.6,40.75 83.32,42.03 80.43,42.03 80.38,42.08 80.38,41.85 80.84,41.39 83.55,41.39
S$261
  Top 0.813: 78.98,42.84 66.41,42.84 65.26,41.37 65.26,42.12 65.82,42.67 65.37,42.67 65.36,42.66 65.08,42.66
S$262
  Top 0.813: 64.38,42.53 64.38,42.69 64.12,42.95
S$263
  Top 0.813: 59.88,41.48 59.82,41.48 58.48,42.82
S$264
  Top 0.813: 59.18,42.71 59.31,42.71 59.66,42.36
S$265
  Top 0.813: 60.13,40.75 60.13,41.05 58.05,43.17
S$266
  Top 0.813: 58.46,43.04 44.21,43.04 43.91,43.15
S$267
  Top 0.813: 34.95,43.28 34.93,43.28 35.4,42.81 37.01,42.81 38.67,41.15 39.02,41.15
S$268
  Top 0.813: 38.89,42.14 38.32,42.14 37.71,42.74
S$269
  Top 0.813: 38.09,42.71 38.76,42.71 39.11,42.36 39.11,42.14 38.79,41.82
S$270
  Top 0.813: 5.85,28.56 4.63,29.77 5.34,29.77
S$271
  Top 0.61: 7.85,25.38 7.85,25.16 8.2,24.81 63.6,24.81 63.68,24.88
S$272
  Top 0.61: 59.97,25.3 59.55,25.3 59.36,25.12
S$273
  Top 0.61: 59.55,25.43 59.09,25.43 58.55,24.9
S$274
  Top 0.61: 46.05,25.18 43.2,25.18 43.12,25.25
S$275
  Top 0.61: 40.17,26.45 41.17,26.45
S$276
  Top 0.61: 39.91,27.93 40.84,27.93 40.91,27.87 40.91,26.85 40.95,26.81 40.84,26.81 40.73,26.92 40.73,27.43 40.62,27.54 40.62,27.47 40.4,27.25 40.4,26.74 40.42,26.72 40.42,27.34 40.11,27.65 40,27.65 39.82,27.82 39.73,26.22 39.75,26.08 41.31,25.74 41.92,26.14 41.92,26.78 41.5,27.2 41.5,26.41 41.24,26.14 40.38,26.14 40.29,26.05 40.29,27.34 40.31,27.36
S$277
  Top 0.61: 43.01,26.08 43.16,25.95 42.01,24.8
S$278
  Top 0.61: 42.96,27.65 42.96,25.55 42.79,25.5
S$279
  Top 0.61: 42.92,27 42.88,27.31 43,27.48 43.22,27.71 42.88,28.04 43.45,28.14 44.23,28.02
S$280
  Top 0.254: 8.56,42.94 8.56,42.88 6.1,40.41
S$281
  Top 0.254: 5.58,37.2 | 5.58,37.2 5.76,37.01 6.17,37.01 6.32,37.16 6.32,38.09 6.7,38.47
S$282
  Top 0.61: 40.09,26.03 17.12,26.03
S$283
  Top 0.61: 10.1,30.07 10.58,30.55
  Top 0.813: 4.07,30.07 10.1,30.07
S$284
  Top 0.813: 10.47,30.25 15.09,30.25 16.2,29.14 20.23,29.14 21.34,30.25
S$285
  Top 0.813: 8.77,30 8.77,25.18 8.8,25.14 8.77,25.14 5.84,28.07 5.84,29.33 5.81,29.37 8.17,29.37 8.21,29.33 8.21,26.33 8.25,26.29 8.25,26.59 6.4,28.44 6.4,28.77 6.36,28.81 7.51,28.81 7.62,28.7 7.62,27.96 7.73,27.85 7.73,28.11 7.4,28.44 7.29,28.44
S$286
  Top 0.813: 8.74,26.98 9.41,26.98 9.75,27.56 11.58,27.56 12.14,26.94 12.14,25.56 12.55,25.15 15.51,25.15 15.68,25.03 15.64,25.09 15.48,25.54 15.48,26.82 16.18,27.51 18.89,27.51 19.2,27.2 21.9,27.2 22.92,28.23 22.92,29.5 22.17,30.26 21.28,30.26 21.15,30.38
S$287
  Top 0.813: 21.97,29.8 21.74,29.8 21.33,29.39 22.16,29.39 22.27,29.5 22.27,28.51 21.6,27.84 15.52,27.84 14.98,27.3 14.98,28.05 15.55,28.62 20.55,28.62 20.97,29.05 21.64,29.05 21.65,29.03 21.65,28.98 21.25,28.59 21.08,28.59 20.89,28.4 9.46,28.4 9.35,28.51 9.35,29.27 9.49,29.42 15.22,29.42 15.3,29.34 15.3,29.28 15.39,29.19 9.67,29.19 9.16,28.69 9.16,29.34 9.41,29.59 14.59,29.59 14.72,29.47
S$288
  Top 0.813: 15.06,29.64 15.06,26.01 14.71,25.65 12.58,25.65 12.34,25.89 12.34,27.55 12.59,27.79 9.16,27.79 9.09,27.87 9.09,27.57 9.11,27.55 14.32,27.55 14.67,27.89 13.57,27.89 13.55,27.88 13.23,27.88 12.8,28.31 12.8,26.31 12.85,26.26 14.28,26.26 14.51,26.48 14.51,26.78 14.45,26.84 13.62,26.84 13.47,26.69 13.08,26.69 13.05,26.73 13.26,26.73 13.37,26.84
S$289
  Top 0.813: 12.92,26.33 12.92,26.24 11.56,24.88
S$290
  Top 0.813: 8.95,27.3 8.95,25.14 8.87,25.07
S$291
  Top 0.813: 10.2,27.91 10.2,27.79 8.62,26.21
S$292
  Top 0.813: 8.71,25.59 8.98,25.59 9.65,24.92
S$293
  Top 0.813: 3.25,32.67 4.36,32.67 4.39,32.7
S$294
  Top 0.813: 5.04,34.68 2.94,34.68 2.91,34.71
S$295
  Top 0.813: 4.83,37.27 0.91,37.27
S$296
  Top 0.813: 5.04,29.89 0.6,29.89
S$297
  Top 0.813: 2.94,29.8 5.03,29.8 5.1,29.88
S$298
  Top 0.813: 2.66,29.98 2.77,29.98 3.32,30.54 5.72,30.54 6.33,29.93
S$299
  Top 0.813: 2.54,37.21 3.23,37.21 3.62,36.82 5.8,36.82 6.03,37.05
S$300
  Top 0.813: 3.18,37.5 5.35,37.5 5.85,38
S$301
  Top 0.813: 83,41.62 83.58,41.62 83.56,43.27 90.11,43.27 90.13,30.1
S$302
  Top 0.813: 82.73,26.29 84.1,26.29 84.1,24.93 90.14,24.93 90.14,30.38
S$303
  Top 0.813: 84.07,42.97 89.29,42.97 89.81,42.46 89.81,38.49 89.46,38.15 89.43,38.15 85.19,42.39 88.99,42.39 89.25,42.14 89.25,39.05 89.27,39.03 89.27,39.23 86.62,41.88 88.54,41.88 88.61,41.94 88.61,41.28 88.54,41.22 88.54,40.94 88.5,40.89 88.5,40.66 88.63,40.53 87.93,40.53 87.05,41.41 87.05,41.56 87.28,41.79 87.28,41.77 87.58,41.47 87.88,41.47 88.05,41.3 88.05,41.09 87.99,41.02 86.77,41.02 85.98,41.81 86.04,41.81 86.06,41.84 86.06,41.3 86.49,40.87 86.77,40.87 87.37,40.27 87.37,40.23 87.26,40.12 87.26,40.04 87.22,39.99
S$304
  Top 0.813: 87.45,39.35 88.99,39.35 89.02,39.33
S$305
  Top 0.813: 89.85,29.66 89.85,29.59 85.72,25.46 89.36,25.46 89.53,25.63 89.53,28.44 89.64,28.54 89.53,28.54 86.83,25.84 87.45,25.84 89.02,27.41 89.02,26.16 88.95,26.1 88.31,26.1 88.2,25.99 87.8,25.99 87.77,26.01 87.77,26.04 88.05,26.31
S$306
  Top 0.813: 44.09,26.31 43.94,26.31 42.78,27.47 42.78,28.42 42.86,28.5 43.73,28.5 44.14,28.09
S$307
  Top 0.406: 38.91,43.25 40.73,43.25 40.96,43.48 86.33,43.48 86.56,43.25
S$308
  Top 0.406: 65.6,42.99 82.97,42.99
S$309
  Top 0.406: 59.87,43.17 59.87,43.1 59.64,42.88
S$310
  Top 0.406: 41.2,43.15 41.14,43.15 40.32,42.33
S$311
  Top 0.406: 39.92,42.48 40.01,42.48 40.52,42.98
S$312
  Top 0.406: 40.28,42.84 40.13,42.84 40.1,42.81
S$313
  Top 0.406: 37.98,41.6 37.98,41.95 38.22,42.18
S$314
  Top 0.406: 45.37,43.12 44.55,43.12 44.46,43.14 43.98,42.66 43.45,43.19
S$315
  Top 0.406: 41.54,43.23 41.3,43.23 40.23,42.16
S$316
  Top 0.406: 64.26,42.33 64.26,42.51 63.45,43.32
S$317
  Top 0.813: 5.64,58.7 8.27,58.7 8.02,59.05
S$318
  Top 0.813: 5.64,56.73 7.71,56.73 8.14,56.8
S$319
  Top 0.813: 7.81,61.54 8.08,61.97 8.08,59.21
S$320
  Top 0.813: 17.78,59.33 21.51,59.33 21.61,59.42
S$321
  Top 0.813: 17.88,56.78 21.67,56.78 21.85,56.93
S$322
  Top 0.813: 4.53,61.28 5.89,61.28
S$323
  Top 0.813: 17.96,64.49 20.35,64.49 20.05,64.55
S$324
  Top 0.813: 30.59,64.15 30.27,64.55 29.35,63.35 29.27,62.12 28.94,61.84
S$325
  Top 0.813: 18.22,61.94 14.64,64.09 9.05,64.09 8.04,64.09 8,64.04
S$326
  Top 0.813: 32.64,60.68 31.96,60.68 31.26,61.96 29.09,61.96
S$327
  Top 0.813: 31.59,52.34 32.69,53.56 32.66,55.49 32.55,55.57
S$328
  Top 0.813: 7.9,64.09 9.33,66.13 16.82,66.13 29.31,66.13
S$329
  Top 0.813: 29.02,56.87 33.51,56.87 34.53,55.63 34.53,53 35.06,52.47 35.57,52.47 35.65,52.55
S$330
  Top 0.813: 28.75,59.34 33.08,59.34 34.27,59.61 34.27,62.8 35.57,64.1
S$331
  Top 0.813: 35.6,59.16 38.33,59.16 38.41,59.24
S$332
  Top 0.813: 35.6,57.51 37.43,57.51 38.36,56.58
S$333
  Top 0.813: 29.13,66.16 33.88,66.16 34.71,65.5 36.37,65.5 38.44,63.43 38.44,61.76 38.38,61.71
S$334
  Top 0.813: 31.06,52.28 33.58,52.28 34.48,51.38 37.4,51.38 38.46,52.44 38.46,53.95 38.36,54.06
S$335
  Top 0.813: 6.34,51.63 6.34,50.8 8.21,48.93
S$336
  Top 0.813: 6.56,65.36 8.43,67.23
S$337
  Top 0.813: 8.47,67.25 40.93,67.28
S$338
  Top 0.813: 5.89,61.66 5.89,62.05 6.88,63.03 8.02,64.52 8.08,64.58 7.74,64.02 7.68,64.09
S$339
  Top 0.813: 4.37,58.7 5.61,58.7
S$340
  Top 0.813: 4.46,56.69 5.58,56.69 5.64,56.76
S$341
  Top 0.813: 6.6,65.36 6.56,65.36 6.02,64.82 6.02,64.18
S$342
  Top 0.254: 4.97,63.68 -4.65,63.68 -4.65,51.69 6.12,51.69 6.12,51.37
S$343
  Top 0.254: 2.39,63.68 5.61,63.68 5.61,63.94
S$344
  Top 0.254: 6.7,65.64 6.44,65.64 5.64,64.84 5.63,63.76 5.58,63.7 5.58,64.78 5.68,64.89
S$345
  Top 0.254: 4.78,63.67 5.94,63.67 6.34,64.07 6.34,64.61 6.97,65.56 7.14,65.57 7.15,65.58
S$346
  Top 0.254: 5.88,64.07 5.88,63.92 5.79,63.82
S$347
  Top 0.254: 5.6,52.51 5.49,52.4 5.49,52.68 5.52,52.71
S$348
  Top 0.254: 6.74,50.59 6.89,50.45
S$349
  Top 0.254: 6.48,52.36 5.69,52.36 5.36,52.03 | 5.36,51.68 5.36,52.03 | 5.36,52.03 5.36,52.75 5.28,52.82 5.28,52.84 5.32,52.88
S$350
  Top 0.254: 6.55,51.96 6.55,51.98
S$351
  Top 0.254: 5.49,51.9 5.54,51.9 5.61,51.98
S$352
  Top 0.254: 5.14,51.83 5.14,52.89
S$353
  Top 0.254: 5.07,63.16 5.51,63.16 6.41,64.06 6.41,64.72
S$354
  Top 0.254: 5.04,63.19 5.04,63.53 5.09,63.58
S$355
  Top 0.254: 5.15,63.39 5.32,63.39 5.49,63.56 5.67,63.56 5.67,63.48 5.49,63.3 5.41,63.3 5.15,63.56
S$356
  Top 0.254: 5.06,52.92 5.06,51.8 5.02,51.76
S$357
  Top 0.254: 6.63,50.37 6.39,50.37 5.11,51.64 5.38,51.64 5.93,51.08 5.93,51.59 5.83,51.7 5.7,51.7 5.62,51.62 5.62,51.56 5.78,51.4 5.88,51.4
S$358
  Top 0.254: 5.09,63.75 5.09,64.29 5.72,64.93 5.72,64.71 5.27,64.26 5.27,63.78 5.25,63.75 5.25,64.04 5.33,64.12 5.33,63.99 5.3,63.97 | 5.3,63.97 | 5.3,63.97 5.41,63.86
S$359
  Top 0.254: 5.39,64.28 5.39,64.19 5.47,64.12
S$360
  Top 0.254: 5.8,52.47 5.8,52.29
S$361
  Top 0.254: 6.57,50.32 6.57,52.27
S$362
  Top 0.813: 38.75,56.46 45.73,56.46 47.48,54.72 47.48,53.92
S$363
  Top 0.813: 38.51,59.32 39.54,59.32 40.81,58.05 47,58.05 50.02,55.04 50.02,54.24 50.1,54.16
S$364
  Top 0.813: 38.51,61.62 40.26,61.62 42.4,59.48 48.43,59.48 50.57,57.34 57.95,57.34
S$365
  Top 0.813: 60.12,54.02 60.12,55.17 57.94,57.34
S$366
  Top 0.813: 60.2,54.93 60.2,56.2 62.75,58.75 62.75,61.54 62.7,61.59
S$367
  Top 0.305: 39.24,48.93 62.25,48.93
  Top 0.813: 62.25,48.93 62.82,49.5 62.82,53.83 62.69,53.96
S$368
  Top 0.813: 67.79,53.93 67.79,56.31 81.52,56.31
S$369
  Top 0.813: 65.25,54.09 65.25,56.15 66.76,57.66 81.04,57.66
S$370
  Top 0.813: 62.55,54.16 62.55,55.99 65.49,58.93 80.17,58.93
S$371
  Top 0.813: 81.07,57.72 81.67,57.72 83.32,59.37 83.32,60.11 83.23,60.2
S$372
  Top 0.813: 81.58,56.3 82.35,56.3 83.32,55.33 83.32,55.1 83.36,55.06
S$373
  Top 0.813: 83.64,55.15 85.98,55.15 87.13,56.3
S$374
  Top 0.813: 83.41,60.15 85.89,60.15 87.27,58.78
S$375
  Top 0.813: 87.17,61.48 84.7,61.48 84.01,62.17 82.72,62.17 81.71,61.16 81.71,60.43 80.43,59.14
S$376
  Top 0.813: 87.31,61.44 87.31,61.21 88.78,59.74 88.78,55.29 87.17,53.68
S$377
  Top 0.813: 47.45,54.08 47.45,51.18 47.52,51.1
S$378
  Top 0.813: 50.05,54.08 50.05,51.18 50.01,51.14
S$379
  Top 0.813: 52.53,54.12 52.53,51.18 52.49,51.14
S$380
  Top 0.813: 55.13,54.08 55.13,51.37 55.06,51.29
S$381
  Top 0.813: 57.58,54.01 57.58,51.18 57.66,51.1
S$382
  Top 0.813: 70.31,54.08 70.31,51.41 70.5,51.21
S$383
  Top 0.813: 73.03,54.08 73.03,51.48 72.84,51.29
S$384
  Top 0.813: 75.44,54.2 75.44,51.21 75.4,51.18
S$385
  Top 0.813: 77.92,54.08 77.92,51.21 77.88,51.18
S$386
  Top 0.813: 77.88,64.26 77.88,61.58 78,61.47
S$387
  Top 0.813: 75.44,64.18 75.44,61.73 75.47,61.69
S$388
  Top 0.813: 72.8,64.26 72.8,61.69 72.84,61.66
S$389
  Top 0.813: 70.43,64.26 70.43,61.77 70.31,61.66
S$390
  Top 0.813: 67.71,64.45 67.71,61.69 67.79,61.62
S$391
  Top 0.813: 44.85,64.26 44.85,61.5 44.92,61.43
S$392
  Top 0.813: 47.52,64.33 47.52,61.62 47.49,61.58
S$393
  Top 0.813: 49.89,64.45 49.89,61.58
S$394
  Top 0.813: 52.49,64.37 52.49,61.58
S$395
  Top 0.813: 55.02,64.41 55.02,61.66 55.09,61.58
S$396
  Top 0.813: 57.62,64.37 57.62,61.66 57.58,61.62
S$397
  Top 0.813: 61.71,48.92 84.5,48.92 90.08,54.5 90.08,60.97 84.88,66.17
S$398
  Top 0.406: 39.69,67.24 60.52,67.24 83.81,67.24
  Top 0.813: 83.81,67.24 85.42,65.63 | 60.14,61.62 60.14,66.86 60.52,67.24
S$399
  Top 0.813: 62.44,61.66 65.23,61.66 65.3,61.58
S$400
  Top 0.813: 66.17,64.13 67.57,64.13 67.7,64.25
S$401
  Top 0.813: 41.33,50.41 41.33,53.2 41.9,53.78 44.77,53.78 44.96,53.97
S$402
  Top 0.813: 39.46,63.56 39.13,63.56 38.86,63.84 38.09,63.84 38.07,63.85
S$403
  Top 0.813: 42.51,63.81 42.51,65.16 42.45,65.22
S$404
  Top 0.813: 39.58,65.94 39.58,66.96 39.64,67.02
S$405
  Top 0.813: 61.77,64.52 61.77,65.16 61.85,65.25
S$406
  Top 0.813: 64.61,66.22 64.61,66.87 64.68,66.95
S$407
  Top 0.813: 65,63.99 66.02,63.99 66.17,64.14
S$408
  Top 0.813: 62.91,52.01 67.16,52.01 67.98,51.18 67.98,49.67 67.42,49.11 63.78,49.11 63.44,49.46 63.44,51.48 66.76,51.48 67.29,50.94 67.29,49.99 67.08,49.78 64.08,49.78 64.02,49.83 64.02,50.81 64.05,50.84 66.73,50.84 66.84,50.73 66.84,50.6 66.6,50.36 64.63,50.36 64.5,50.49
S$409
  Top 0.813: 67.85,50.09 67.85,49.94 68.67,49.11
S$410
  Top 0.813: 63.33,51.69 60.33,51.69 59.75,51.1 59.75,49.96 58.87,49.09
S$411
  Top 0.813: 59.99,49.27 59.99,50.52 60.62,51.16 62.06,51.16 62.27,50.94 62.27,49.88 61.74,49.35 60.49,49.35 60.38,49.46 60.38,50.07 60.7,50.39 61.66,50.39 61.71,50.44 61.71,50.09 61.47,49.85 61.13,49.85 61.02,49.96
S$412
  Top 0.813: 79.3,49.12 79.33,49.12 80.28,50.07 80.28,52.18 79.49,52.97 79.49,54.41 79.84,54.76 81.33,54.76 81.91,54.18 81.91,53.83 82.55,53.2 84.36,53.2 84.81,53.64 85.51,53.64 85.86,53.29 85.86,52.94 86.75,52.05 87.48,52.05 87.67,52.24
S$413
  Top 0.813: 86.62,52.46 87.94,52.46 87.95,52.47
S$414
  Top 0.813: 86.72,51.81 86.52,51.81 84.27,49.56 80.27,49.56 80.23,49.52 80.23,49.65 80.84,50.26 84.2,50.26 85.95,52.01 85.95,52.22 85.12,53.04 84.77,53.04 84.4,52.67 84.71,52.67 85.19,52.2 85.19,52.18 83.85,50.83 80.82,50.83 80.79,50.87 80.79,52.53 80.62,52.69 80.51,52.69 79.88,53.32 79.88,53.89 80.05,54.06 81.23,54.06 81.5,53.78 80.58,53.78 80.34,53.54 81.39,53.54 81.95,52.99 81.01,52.99 80.97,52.95 83.62,52.95 84.36,52.21 84.36,52.14 83.66,51.44 81.38,51.44 81.27,51.55 81.27,52.16 81.32,52.21 83.55,52.21 83.64,52.31 83.64,52.2 83.51,52.07 83.42,52.07 83.16,51.81
S$415
  Top 0.813: 46.31,49.02 46.31,49.3 45.54,50.08 45.54,51.37 45.19,51.72 44.32,51.72 43.58,52.45 42.86,52.45 43.03,52.02 43.32,51.57 42.92,51.44 42.92,51.42 43.1,51.24 43.1,49.73 42.48,49.1
S$416
  Top 0.813: 43.36,49.56 45.43,49.56 45.48,49.5
S$417
  Top 0.813: 43.07,51.94 43.23,51.94 43.93,51.24 44.62,51.24 44.95,50.91 44.95,50.22 44.93,50.2 43.56,50.2 43.55,50.22 43.55,51.18 43.42,51.31 43.51,51.31 44.08,50.74 44.23,50.74 44.25,50.72
S$418
  Top 0.813: 87.77,63.05 85.38,63.05 84.88,63.55 81.94,63.55 80.75,62.36 80.75,62.31 80.29,61.85 79.69,61.85 79.56,61.99 79.56,63.6 79.74,63.78 79.74,65.57 78.32,66.99 79.14,66.99 80.38,65.75 80.38,62.82 80.15,62.59 80.15,62.68 81.12,63.64 86.81,63.64 86.85,63.6 81.3,63.6 80.75,64.15 85.98,64.15 86.03,64.1 86.03,64.24 83.64,66.63 80.15,66.63 80.11,66.58 80.11,65.43 80.84,64.7 84.92,64.7 84.97,64.75 84.6,64.75 83.32,66.03 80.43,66.03 80.38,66.08 80.38,65.85 80.84,65.39 83.55,65.39
S$419
  Top 0.813: 78.98,66.84 66.41,66.84 65.26,65.36 65.26,66.12 65.82,66.67 65.37,66.67 65.36,66.65 65.08,66.65
S$420
  Top 0.813: 64.38,66.52 64.38,66.69 64.12,66.95
S$421
  Top 0.813: 59.88,65.47 59.82,65.47 58.48,66.82
S$422
  Top 0.813: 59.18,66.71 59.31,66.71 59.66,66.36
S$423
  Top 0.813: 60.13,64.75 60.13,65.05 58.05,67.17
S$424
  Top 0.813: 58.46,67.04 44.21,67.04 43.91,67.15
S$425
  Top 0.813: 34.95,67.28 34.93,67.28 35.4,66.8 37.01,66.8 38.67,65.15 39.02,65.15
S$426
  Top 0.813: 38.89,66.14 38.32,66.14 37.71,66.74
S$427
  Top 0.813: 38.09,66.71 38.76,66.71 39.11,66.36 39.11,66.14 38.79,65.82
S$428
  Top 0.813: 5.85,52.56 4.63,53.77 5.34,53.77
S$429
  Top 0.61: 7.85,49.38 7.85,49.15 8.2,48.8 63.6,48.8 63.68,48.88
S$430
  Top 0.61: 59.97,49.3 59.55,49.3 59.36,49.12
S$431
  Top 0.61: 59.55,49.43 59.09,49.43 58.55,48.9
S$432
  Top 0.61: 46.05,49.17 43.2,49.17 43.12,49.25
S$433
  Top 0.61: 40.17,50.44 41.17,50.44
S$434
  Top 0.61: 39.91,51.93 40.84,51.93 40.91,51.86 40.91,50.85 40.95,50.8 40.84,50.8 40.73,50.91 40.73,51.42 40.62,51.53 40.62,51.47 40.4,51.24 40.4,50.74 40.42,50.71 40.42,51.33 40.11,51.64 40,51.64 39.82,51.82 39.73,50.22 39.75,50.08 41.31,49.74 41.92,50.14 41.92,50.78 41.5,51.2 41.5,50.4 41.24,50.14 40.38,50.14 40.29,50.05 40.29,51.33 40.31,51.36
S$435
  Top 0.61: 43.01,50.07 43.16,49.94 42.01,48.79
S$436
  Top 0.61: 42.96,51.64 42.96,49.54 42.79,49.5
S$437
  Top 0.61: 42.92,51 42.88,51.31 43,51.47 43.22,51.71 42.88,52.03 43.45,52.13 44.23,52.02
S$438
  Top 0.254: 8.56,66.94 8.56,66.88 6.1,64.41
S$439
  Top 0.254: 5.58,61.19 | 5.58,61.19 5.76,61.01 6.17,61.01 6.32,61.15 6.32,62.08 6.7,62.46
S$440
  Top 0.61: 40.09,50.03 17.12,50.03
S$441
  Top 0.61: 10.1,54.07 10.58,54.55
  Top 0.813: 4.07,54.07 10.1,54.07
S$442
  Top 0.813: 10.47,54.25 15.09,54.25 16.2,53.14 20.23,53.14 21.34,54.25
S$443
  Top 0.813: 8.77,53.99 8.77,49.17 8.8,49.14 8.77,49.14 5.84,52.06 5.84,53.33 5.81,53.36 8.17,53.36 8.21,53.33 8.21,50.32 8.25,50.29 8.25,50.59 6.4,52.44 6.4,52.77 6.36,52.81 7.51,52.81 7.62,52.7 7.62,51.95 7.73,51.84 7.73,52.1 7.4,52.44 7.29,52.44
S$444
  Top 0.813: 8.74,50.97 9.41,50.97 9.75,51.55 11.58,51.55 12.14,50.94 12.14,49.56 12.55,49.15 15.51,49.15 15.68,49.02 15.64,49.09 15.48,49.53 15.48,50.81 16.18,51.51 18.89,51.51 19.2,51.2 21.9,51.2 22.92,52.22 22.92,53.5 22.17,54.26 21.28,54.26 21.15,54.38
S$445
  Top 0.813: 21.97,53.8 21.74,53.8 21.33,53.39 22.16,53.39 22.27,53.5 22.27,52.51 21.6,51.84 15.52,51.84 14.98,51.3 14.98,52.05 15.55,52.62 20.55,52.62 20.97,53.04 21.64,53.04 21.65,53.03 21.65,52.98 21.25,52.58 21.08,52.58 20.89,52.4 9.46,52.4 9.35,52.51 9.35,53.27 9.49,53.41 15.22,53.41 15.3,53.34 15.3,53.28 15.39,53.19 9.67,53.19 9.16,52.68 9.16,53.34 9.41,53.59 14.59,53.59 14.72,53.46
S$446
  Top 0.813: 15.06,53.64 15.06,50.01 14.71,49.65 12.58,49.65 12.34,49.88 12.34,51.54 12.59,51.79 9.16,51.79 9.09,51.87 9.09,51.57 9.11,51.54 14.32,51.54 14.67,51.89 13.57,51.89 13.55,51.88 13.23,51.88 12.8,52.31 12.8,50.3 12.85,50.25 14.28,50.25 14.51,50.48 14.51,50.77 14.45,50.84 13.62,50.84 13.47,50.69 13.08,50.69 13.05,50.72 13.26,50.72 13.37,50.84
S$447
  Top 0.813: 12.92,50.33 12.92,50.24 11.56,48.88
S$448
  Top 0.813: 8.95,51.3 8.95,49.14 8.87,49.06
S$449
  Top 0.813: 10.2,51.91 10.2,51.78 8.62,50.21
S$450
  Top 0.813: 8.71,49.59 8.98,49.59 9.65,48.91
S$451
  Top 0.813: 3.25,56.67 4.36,56.67 4.39,56.7
S$452
  Top 0.813: 5.04,58.67 2.94,58.67 2.91,58.7
S$453
  Top 0.813: 4.83,61.27 0.91,61.27
S$454
  Top 0.813: 5.04,53.89 0.6,53.89
S$455
  Top 0.813: 2.94,53.8 5.03,53.8 5.1,53.87
S$456
  Top 0.813: 2.66,53.98 2.77,53.98 3.32,54.53 5.72,54.53 6.33,53.92
S$457
  Top 0.813: 2.54,61.21 3.23,61.21 3.62,60.81 5.8,60.81 6.03,61.05
S$458
  Top 0.813: 3.18,61.49 5.35,61.49 5.85,61.99
S$459
  Top 0.813: 83,65.62 83.58,65.62 83.56,67.26 90.11,67.26 90.13,54.1
S$460
  Top 0.813: 82.73,50.28 84.1,50.28 84.1,48.92 90.14,48.92 90.14,54.37
S$461
  Top 0.813: 84.07,66.97 89.29,66.97 89.81,66.45 89.81,62.49 89.46,62.15 89.43,62.15 85.19,66.39 88.99,66.39 89.25,66.13 89.25,63.05 89.27,63.02 89.27,63.22 86.62,65.88 88.54,65.88 88.61,65.94 88.61,65.28 88.54,65.21 88.54,64.93 88.5,64.89 88.5,64.65 88.63,64.53 87.93,64.53 87.05,65.4 87.05,65.56 87.28,65.79 87.28,65.77 87.58,65.47 87.88,65.47 88.05,65.3 88.05,65.08 87.99,65.02 86.77,65.02 85.98,65.81 86.04,65.81 86.06,65.83 86.06,65.3 86.49,64.87 86.77,64.87 87.37,64.27 87.37,64.22 87.26,64.12 87.26,64.03 87.22,63.99
S$462
  Top 0.813: 87.45,63.35 88.99,63.35 89.02,63.32
S$463
  Top 0.813: 89.85,53.66 89.85,53.58 85.72,49.45 89.36,49.45 89.53,49.62 89.53,52.43 89.64,52.54 89.53,52.54 86.83,49.84 87.45,49.84 89.02,51.4 89.02,50.16 88.95,50.1 88.31,50.1 88.2,49.99 87.8,49.99 87.77,50.01 87.77,50.03 88.05,50.31
S$464
  Top 0.813: 44.09,50.31 43.94,50.31 42.78,51.47 42.78,52.42 42.86,52.5 43.73,52.5 44.14,52.08
S$465
  Top 0.406: 38.91,67.25 40.73,67.25 40.96,67.48 86.33,67.48 86.56,67.24
S$466
  Top 0.406: 65.6,66.98 82.97,66.98
S$467
  Top 0.406: 59.87,67.17 59.87,67.09 59.64,66.87
S$468
  Top 0.406: 41.2,67.14 41.14,67.14 40.32,66.33
S$469
  Top 0.406: 39.92,66.47 40.01,66.47 40.52,66.98
S$470
  Top 0.406: 40.28,66.83 40.13,66.83 40.1,66.8
S$471
  Top 0.406: 37.98,65.6 37.98,65.94 38.22,66.18
S$472
  Top 0.406: 45.37,67.12 44.55,67.12 44.46,67.14 43.98,66.66 43.45,67.19
S$473
  Top 0.406: 41.54,67.23 41.3,67.23 40.23,66.16
S$474
  Top 0.406: 64.26,66.32 64.26,66.51 63.45,67.31